# Altium PCB triple_integrated_driver_stepper_motor_controller_arduino_shield.pcbdoc (part 2 of 2)
Units mil, origin at the board's own origin, x right, y up, seen from the top; angles counter-clockwise.
Board outline 5050 x 3825 mil, 2 copper layers (Top Layer, Bottom Layer); 76 components, 119 nets, 386 pads, 303 vias.
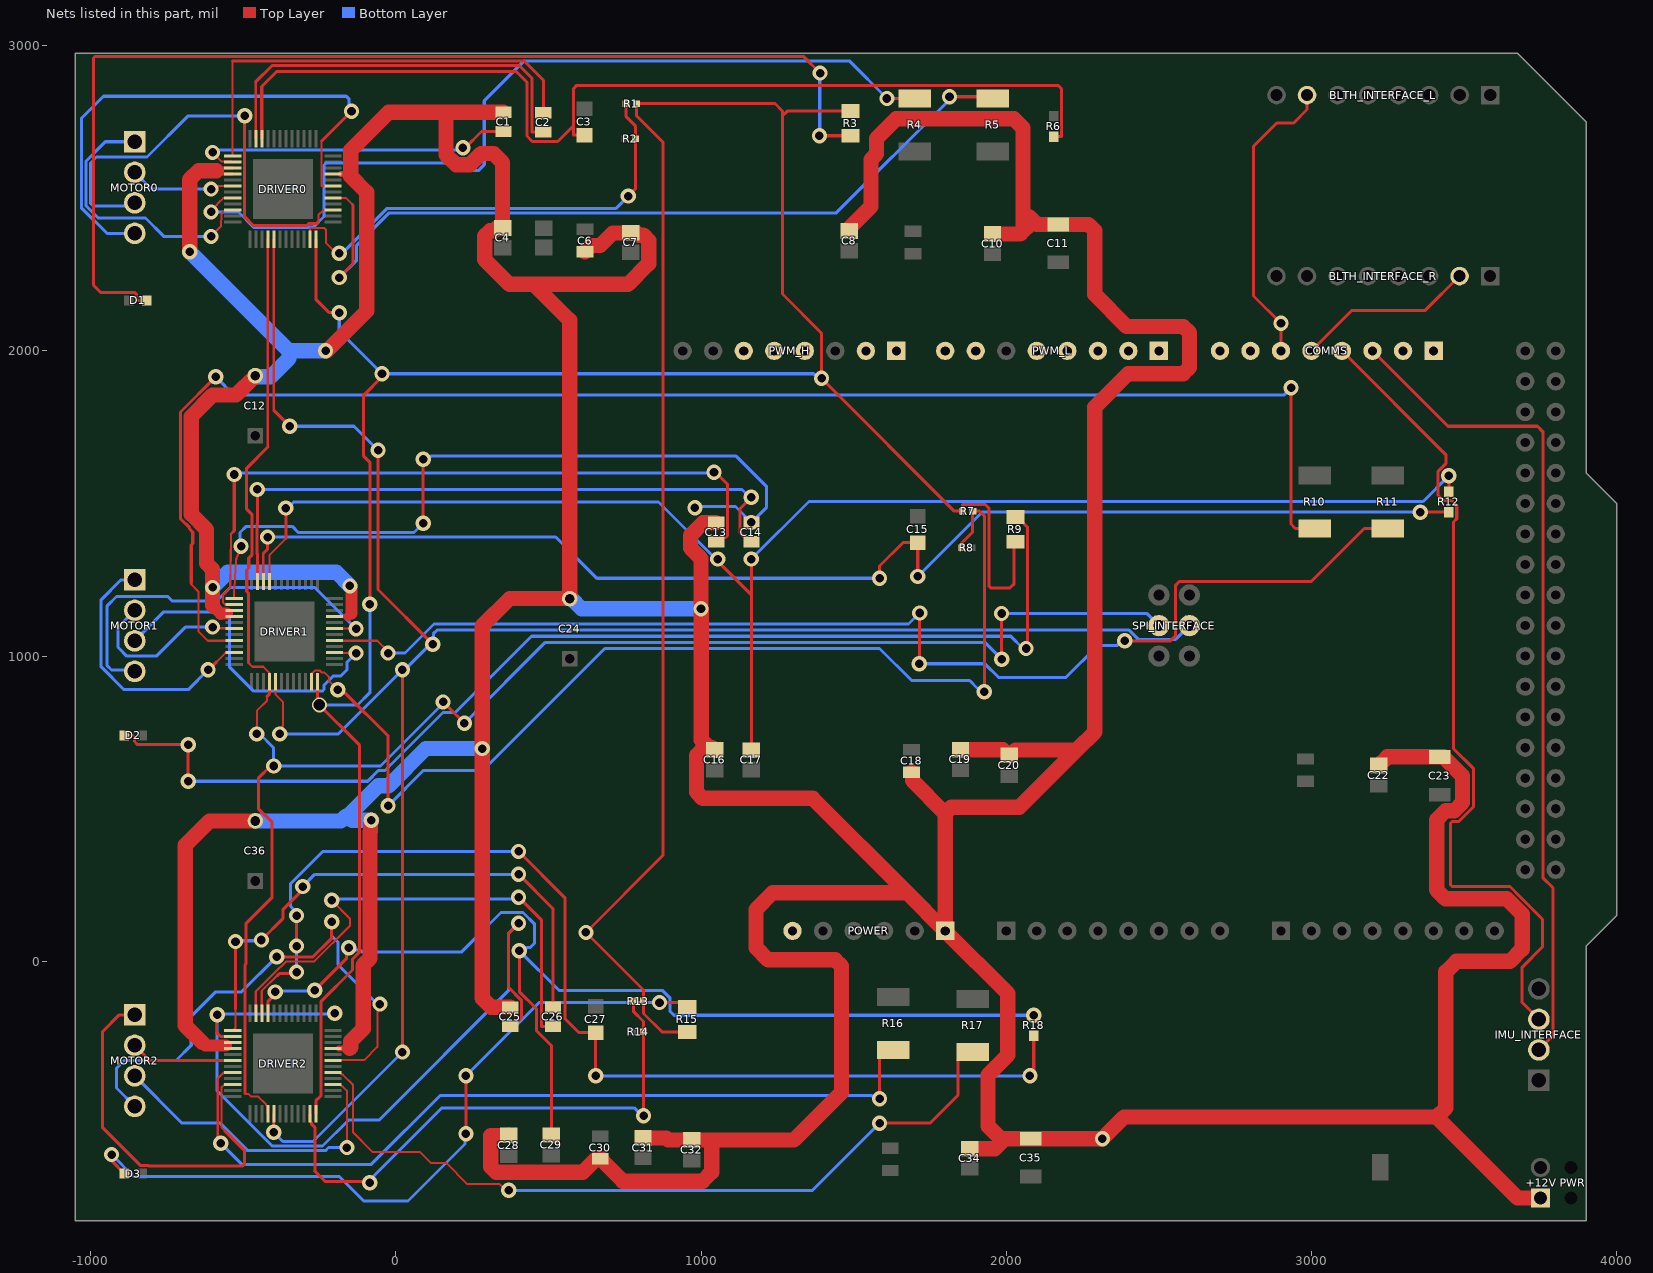
[diagram p2: the nets of this part, all layers, seen from the top]

## Via types
v1: diameter 50, hole 28, Top Layer to Bottom Layer, 157 vias
v2: diameter 22, hole 12, Top Layer to Bottom Layer, tented both sides, 141 vias
v3: diameter 23, hole 13, Top Layer to Bottom Layer, 1 vias
v4: diameter 22, hole 12.5, Top Layer to Bottom Layer, 1 vias
v5: diameter 40, hole 20, Top Layer to Bottom Layer, 1 vias
v6: diameter 50, hole 18, Top Layer to Bottom Layer, 1 vias
v7: diameter 50, hole 38, Top Layer to Bottom Layer, 1 vias

## Nets (pads, with @x,y where several pads share a name; then routed paths per layer and width w, separated by ;. In a path a pad name is that pad's centre, name@x,y a point inside that pad or via, vN(x,y) a via of type N, cw(c..) or ccw(c..) an arc to the next point about the centre after c; other vN are vias at no path point) (continued)
MOSI: DRIVER0.5 DRIVER1.5 DRIVER2.5 SPI_INTERFACE.4 | length 6889.5
  Top Layer w6.89: v1(-400,-560) -399.76,-559.76 -399.76,-499.61 DRIVER2.5@-399.53,-499.37 ; -399.53,1805.53 DRIVER0.5@-399.53,2365.63 ; DRIVER1.5@-394.53,915.63 -394.53,874.53 -370,850 -370,770.59 -371.75,768.84 -371.75,757.51 -380,749.26 v1(-380,745)
  Top Layer w10: -399.53,1805.53 v1(-347,1753) ; v1(-58,1674) -58,1218 v1(121,1039) ; v1(22,-297) v1(22,955)
  Bottom Layer w10: v1(-400,-560) -370,-590 -317.59,-590 -317.53,-590.06 -288.54,-590.06 -288.48,-590 -271,-590 v1(22,-297) ; v1(-380,745) -188,745 v1(22,955) 29.5,955 113.5,1039 v1(121,1039) 123.14,1041.14 123.14,1073.14 135,1085 2402.5,1085 2432.5,1055 2555,1055 SPI_INTERFACE.4@2600,1100 ; v1(-347,1753) -137,1753 v1(-58,1674)
NetC1_1: C1.1 DRIVER0.38 | length 1060.3
  Top Layer w6.89: v1(-600,2650) -570.06,2620.06 -535.85,2620.06 DRIVER0.38@-534.37,2618.58
  Top Layer w10: v1(220,2665) 227.5,2665 281,2718.5 C1.1@353.27,2718.5
  Bottom Layer w10: v1(-600,2650) -592.5,2657.5 212.5,2657.5 v1(220,2665)
NetC2_1: C2.1 DRIVER0.35 | length 1344.5
  Top Layer w6.89: DRIVER0.35@-458.58,2694.37 -458.58,2881.42
  Top Layer w10: -458.58,2881.42 -405,2935 405,2935 446,2894 446,2718.01 447,2717.01 C2.1@483.27,2717.01
NetC2_2: C2.2 DRIVER0.37 | length 1464.2
  Top Layer w6.89: -535,2950 -535,2638.27 DRIVER0.37@-534.37,2638.27
  Top Layer w10: -535,2950 420,2950 484,2886 484,2780.73 C2.2@483.27,2780
NetC13_1: C13.1 DRIVER1.38 | length 2321.6
  Top Layer w6.89: -540,1400 -540,1394.29 -542.02,1224.62 -566.36,1200.28 -566.36,1176.94 -558,1168.58 DRIVER1.38@-529.37,1168.58
  Top Layer w10: -540,1400 -529,1411 v1(-529,1595) ; v1(1042.5,1602.5) 1047.5,1602.5 1086.57,1563.43 1086.57,1394.56 1080.72,1388.7 1063.7,1388.7 C13.1@1050,1375
  Bottom Layer w10: v1(-529,1595) -524,1600 1040,1600 v1(1042.5,1602.5)
NetC14_1: C14.1 DRIVER1.35 | length 2112.1
  Top Layer w10: DRIVER1.35@-453.58,1244.37 -453.58,1335.5 -455,1336.91 -455,1431.51 -453.58,1432.93 v1(-453.58,1546) ; C14.1@1165,1375 1157.13,1375 1128.43,1403.7 1128.43,1483.43 v1(1165,1520)
  Bottom Layer w10: v1(-453.58,1546) 1134.43,1546 1160.43,1520 v1(1165,1520)
NetC14_2: C14.2 DRIVER1.37 | length 2578.6
  Top Layer w6.89: DRIVER1.37@-529.37,1188.27 -529.37,1189.11 -530,1189.74 -530,1219.82 -527.77,1222.05 -523.73,1316.24 -522.56,1317.41 -506.56,1355 v1(-506.56,1360)
  Top Layer w10: v1(90,1435) v1(90,1645)
  Bottom Layer w10: v1(-506.56,1360) -510,1363.44 -510,1405 -490,1425 -339.5,1425 -319.5,1405 60,1405 v1(90,1435) ; v1(90,1645) 97.65,1652.65 113.51,1652.65 115.86,1655 1115,1655 1215,1555 1215,1487.99 v1(1165,1437.99) 1112.99,1490 983.95,1490 v1(980,1486.05)
NetC15_1: C15.1 DRIVER1.34 R12.1 | length 4347
  Top Layer w6.89: DRIVER1.34@-433.9,1244.37 -433.9,1336.1
  Top Layer w10: -433.9,1336.1 -420,1350 v1(-420,1390) ; v1(1585,1255) 1585,1295 1661.69,1371.69 C15.1@1710,1371.69 v1(1710,1261) ; v1(3356.54,1471.54) R12.1@3450,1471.54
  Bottom Layer w10: v1(-420,1390) 523.83,1390 658.83,1255 v1(1585,1255) ; v1(1710,1261) 1920.54,1471.54 v1(3356.54,1471.54)
NetC17_2: C17.2 DRIVER1.33 R12.2 | length 5003.5
  Top Layer w6.89: DRIVER1.33@-414.21,1244.37 -414.21,1330.79 -360,1385
  Top Layer w10: -360,1385 v1(-360,1485) ; v1(1055,1318) 1055,1311 1165,1201 ; C17.2@1165,691.5 1165,1201 ; v1(1165,1318) 1165,1201 ; R12.2@3450,1538.46 v1(3450,1591)
  Bottom Layer w10: v1(-360,1485) -354.14,1485 -334.14,1505 861,1505 1048,1318 v1(1055,1318) ; v1(1165,1318) 1353.54,1506.54 3365.54,1506.54 v1(3450,1591)
NetC25_1: C25.1 DRIVER2.38 | length 2614.9
  Top Layer w6.89: -585,-235 v1(-585,-175)
  Top Layer w10: -585,-235 -573.58,-246.42 DRIVER2.38@-534.37,-246.42 ; C25.1@375,-212.99 382.87,-212.99 411.57,-184.29 411.57,-127.16 370,-85.58 370,92.5 v1(402.5,125)
  Bottom Layer w10: v1(-200,-170) -202.5,-172.5 -582.5,-172.5 v1(-585,-175) -585,-424.5 -404.5,-605 -323.8,-605 -323.75,-605.06 -282.32,-605.06 -282.27,-605 -240,-605 -155,-520 -55,-520 370,-95 370,92.5 v1(402.5,125)
NetC26_1: C26.1 DRIVER2.35 | length 1685
  Top Layer w6.89: DRIVER2.35@-458.58,-170.63 -458.58,-101.44 -458.58,-98.58 -391.57,-31.57 -386.8,-26.8 -367.86,-10.07 ccw(c-390,15) -367.52,-9.77 ccw(c-390,15) -366.35,-8.65 -357.7,0 -267.05,0 -150,117.05 -150,140 v1(-210,200)
  Top Layer w10: v1(402.5,210) 478,134.5 478,-212.99 C26.1@515,-212.99
  Bottom Layer w10: v1(-210,200) -205,205 397.5,205 v1(402.5,210)
NetC26_2: C26.2 DRIVER2.37 | length 1819
  Top Layer w6.89: DRIVER2.37@-534.37,-226.73 -524.47,-216.83 -524.47,-156.48
  Top Layer w10: -525,-155.94 v1(-525,65) ; v1(-440,70) -370,140 -370,169.18 -305,234.18 v1(-305,245) ; v1(402.5,285) 515,172.5 C26.2@515,-150
  Bottom Layer w10: v1(-525,65) -522.5,67.5 -442.5,67.5 v1(-440,70) ; v1(-305,245) -265,285 v1(402.5,285)
NetC27_1: C27.1 DRIVER2.34 R18.1 | length 3734.4
  Top Layer w6.89: DRIVER2.34@-438.9,-170.63 -438.9,-96.6 -388.4,-46.1 -387.09,-46.1
  Top Layer w10: -387.74,-46.76 -381.23,-40.24 -330.24,-40.24 v1(-325,-35) ; v1(-325,50) v1(-325,150) ; v1(402.5,360) 554,208.5 554,-187.31 600,-233.31 C27.1@655,-233.31 v1(655,-375) ; v1(2077.5,-375) 2090,-362.5 R18.1@2090,-243.46
  Bottom Layer w10: v1(-325,-35) v1(-325,50) ; v1(-325,150) -325,160.82 -345,180.82 -345,254.5 -239.5,360 v1(402.5,360) ; v1(655,-375) v1(2077.5,-375)
NetC29_2: C29.2 DRIVER2.33 R18.2 | length 3651.7
  Top Layer w10: DRIVER2.33@-419.21,-170.63 -419.13,-170.55 -419.13,-132.44 -395,-108.3 v1(-395,-100) ; v1(-265,-95) -161.91,8.09 -161.91,36.63 v1(-154.26,44.28) ; v1(405,35) 405,-99.37 461.33,-155.7 461.33,-227.33 510,-276 C29.2@510,-570
  Bottom Layer w10: v1(-395,-100) -392.5,-97.5 -267.5,-97.5 v1(-265,-95) ; v1(-154.26,44.28) -146.61,36.63 -115.89,36.63 -109.26,30 215,30 345,160 417,160 455,122 455,60 440,45 430.86,45 428.51,42.65 412.65,42.65 v1(405,35) 535,-95 873.5,-95 899,-120.5 899,-164.14 911.39,-176.54 v1(2090,-176.54)
NetD1_2: D1.2 R3.2 | length 3661.1
  Top Layer w10: D1.2@-815.47,2165 -842.92,2165 -848.78,2170.86 -848.78,2184.89 -854.64,2190.75 -965.75,2190.75 -990,2215 -990,2959.14 -984.14,2965 1335,2965 v1(1390,2910) ; v1(1388,2704.58) R3.2@1490,2704.58
  Bottom Layer w10: v1(1388,2704.58) 1389,2705.58 1389,2909 v1(1390,2910)
NetD2_2: D2.2 R9.2 | length 3760.9
  Top Layer w10: D2.2@-889.06,740 -861.61,740 -855.75,734.14 -855.75,720.11 -845.64,710 v1(-680,710) v1(-680,590) ; R9.2@2030,1455.42 2036.88,1455.42 2069.69,1422.61 2069.69,1029.69 v1(2065,1025)
  Bottom Layer w10: v1(-680,590) -92.19,590 -57.19,625 -35,625 155,815 195,815 445,1065 2014.72,1065 2054.72,1025 v1(2065,1025)
NetD3_2: D3.2 R15.2 | length 2432.4
  Top Layer w10: v1(-930.83,-633) -930.83,-653.22 D3.2@-889.06,-695 ; v1(230,-565) v1(230,-375) ; v1(864,-135) 940,-135 R15.2@955,-150
  Bottom Layer w10: v1(-930.83,-633) -858.83,-705 -185,-705 -105,-785 40,-785 226.72,-598.28 226.72,-568.28 v1(230,-565) ; v1(230,-375) 470,-135 v1(864,-135)
NetDRIVER0_15: DRIVER0.15 MOTOR0.3 | length 1520.1
  Top Layer w6.89: -254,2423 -253,2424 -253,2445.6 -237.5,2461.1 DRIVER0.15@-205.63,2461.1
  Top Layer w10: v1(-495,2770) -495,2439 -466,2410 -292.43,2410 -285.93,2416.5 -260.5,2416.5 -254,2423
  Bottom Layer w10: MOTOR0.3@-855,2485 -865.2,2474.8 -991.9,2474.8 -1000,2482.9 -1000,2615 -980,2635 -815,2635 -680,2770 v1(-495,2770)
NetDRIVER0_17: DRIVER0.17 R5.1 | length 2753.5
  Top Layer w6.89: DRIVER0.17@-205.63,2500.47 -162.5,2500.47 -141,2478.97
  Top Layer w10: v1(-185,2240) -140,2285 -140,2477.97 -141,2478.97 ; v1(1814,2832.5) 1949.15,2832.5 R5.1@1955,2826.65
  Bottom Layer w10: v1(-185,2240) -128.25,2296.75 -128.25,2345.54 -21.78,2452.01 1443.01,2452.01 1814,2823 v1(1814,2832.5)
NetDRIVER0_19: DRIVER0.19 MOTOR0.4 | length 1778.7
  Top Layer w6.89: -243,2687 -243,2540.84 -242,2539.84 DRIVER0.19@-205.63,2539.84
  Top Layer w10: -243,2687 v1(-145,2785)
  Bottom Layer w10: MOTOR0.4@-855,2385 -946.21,2385 -1030,2468.79 -1030,2761.21 -957.07,2834.14 -162.54,2834.14 -152.65,2824.26 -152.65,2792.65 v1(-145,2785)
NetDRIVER0_42: DRIVER0.42 MOTOR0.2 | length 347.5
  Top Layer w6.89: v1(-605,2530) -593.33,2530 -583.49,2539.84 DRIVER0.42@-534.37,2539.84
  Bottom Layer w10: MOTOR0.2@-855,2585 -800,2530 v1(-605,2530)
NetDRIVER0_44: DRIVER0.44 R4.1 | length 2936.1
  Top Layer w6.89: v1(-605,2455) -580.56,2485.44 -565.53,2500.47 DRIVER0.44@-534.37,2500.47
  Top Layer w10: v1(1609,2826.65) R4.1@1700,2826.65
  Bottom Layer w10: v1(-605,2455) -515,2455 -465,2405 -270,2405 -235,2440 -235,2609.14 -229.14,2615 190.58,2615 215.38,2590.2 270.2,2590.2 290,2610 290,2819.14 420.86,2950 1485.65,2950 v1(1609,2826.65)
NetDRIVER0_46: DRIVER0.46 MOTOR0.1 | length 913.2
  Top Layer w6.89: v1(-605,2375) -605,2375.86 -571.92,2408.94 -571.36,2449.84 -566.41,2454.78 -559.47,2459.63 DRIVER0.46@-534.37,2461.1
  Bottom Layer w10: MOTOR0.1@-855,2685 -951.21,2685 -1015,2621.21 -1015,2475 -975,2435 -820,2435 -760,2375 v1(-605,2375)
NetDRIVER1_11: DRIVER1.11 R7.2 R8.1 | length 3587.6
  Top Layer w6.89: DRIVER1.11@-276.42,915.63 -274.94,917.11 -274.94,942.83 -265.15,952.62 -248.31,952.62 -241.66,945.96 -232.96,945.96 -219.12,932.12 -219.12,919.12 v1(-190,890)
  Top Layer w10: v1(-190,890) -179.18,890 -167.39,878.22 -165.22,878.22 -25,738 v1(-25,510) ; R8.1@1853.27,1355 1853.27,1369.83 1890,1406.57 R7.2@1890,1475 1912.5,1475 1928,1459.5 v1(1928,883)
  Bottom Layer w10: v1(-25,510) 90,625 285,625 685,1025 1585,1025 1690,920 1880,920 1904.22,895.78 1904.39,895.78 1917.18,883 v1(1928,883)
NetDRIVER1_15: DRIVER1.15 MOTOR1.3 | length 1114.5
  Top Layer w6.89: DRIVER1.15@-200.63,1011.1 -200.08,1010.55 -130.55,1010.55 v1(-130,1010)
  Bottom Layer w10: MOTOR1.3@-855,1050 -760,1145 -560,1145 -545,1130 -545,965 -465,885 -240.86,885 -235,890.86 -235,905 -205,935 -180,935 -160,955 -160,980 v1(-130,1010)
NetDRIVER1_17: DRIVER1.17 R11.1 | length 4010.1
  Top Layer w6.89: DRIVER1.17@-200.63,1050.47 -60.47,1050.47 -25,1015 v1(-25,1010)
  Top Layer w10: v1(1715,975) 1715.59,975.59 1715.59,1140.59 v1(1716.17,1141.17) ; v1(2388,1050) 2537.5,1050 2555,1067.5 2555,1232.5 2567.5,1245 2999.65,1245 3173,1418.35 R11.1@3250,1418.35
  Bottom Layer w10: v1(-25,1010) 30,1010 125,1105 1680,1105 v1(1716.17,1141.17) ; v1(1715,975) 1930,975 1975,930 2195,930 2299.23,1034.23 2362.14,1034.23 2377.91,1050 v1(2388,1050)
NetDRIVER1_19: DRIVER1.19 MOTOR1.4 | length 1273.6
  Top Layer w6.89: DRIVER1.19@-200.63,1089.84 v1@-130,1089.84
  Bottom Layer w10: MOTOR1.4@-855,950 -859.61,954.61 -931.18,954.61 -945.2,968.63 -945.2,1164.8 -914.57,1195.43 -746.65,1195.43 -731.21,1180 -587.5,1180 -542.5,1225 -265,1225 v1(-130,1090)
NetDRIVER1_42: DRIVER1.42 MOTOR1.2 | length 577.8
  Top Layer w6.89: v1(-600,1095) -596.32,1091.32 -530.85,1091.32 DRIVER1.42@-529.37,1089.84
  Bottom Layer w10: MOTOR1.2@-855,1150 -910,1095 -910,1029.14 -880.86,1000 -784.41,1000 -689.41,1095 v1(-600,1095)
NetDRIVER1_44: DRIVER1.44 R10.1 | length 5126.6
  Top Layer w6.89: -670,1240 -670,1235 -646.56,1211.56 -646.56,1081.56 -615.47,1050.47 DRIVER1.44@-529.37,1050.47
  Top Layer w10: -670,1240 -670,1363.79 -665,1368.79 -665,1406.21 -675,1416.21 -675,1420 -705,1450 -705,1800 v1(-590,1915) ; v1(2933,1879) 2933,1432.5 2947.15,1418.35 R10.1@3010,1418.35
  Bottom Layer w10: v1(-590,1915) -530,1855 2908.72,1855 2932.72,1879 v1(2933,1879)
NetDRIVER1_46: DRIVER1.46 MOTOR1.1 | length 873.8
  Top Layer w6.89: -588.1,980 -557,1011.1 DRIVER1.46@-529.37,1011.1
  Top Layer w10: v1(-614.81,955) -613.1,955 -588.1,980
  Bottom Layer w10: MOTOR1.1@-855,1250 -900,1250 -965,1185 -965,965 -890,890 -679.81,890 v1(-614.81,955)
NetDRIVER2_11: DRIVER2.11 R13.2 R14.1 | length 1795.3
  Top Layer w10: DRIVER2.11@-281.42,-499.37 -281.42,-522.83 -276.65,-527.6 -276.65,-532.06 -265,-543.71 -265,-685 -266.22,-686.22 -231.95,-720.5 -89.5,-720.5 v1(-85,-725) ; R13.2@778.27,-130 778.27,-163.54 811.73,-197 R14.1@811.73,-230 v1(811.73,-506)
  Bottom Layer w10: v1(-85,-725) -85,-716.5 151.5,-480 781.16,-480 807.16,-506 v1(811.73,-506)
NetDRIVER2_15: DRIVER2.15 MOTOR2.3 | length 1040.7
  Top Layer w6.89: DRIVER2.15@-205.63,-403.9 -182.01,-403.9 -175.69,-410.22 -173.59,-410.22 -160,-423.8 v1(-160,-610)
  Bottom Layer w10: MOTOR2.3@-855,-375 -700,-530 -575,-530 -485,-620 -330.01,-620 -329.96,-620.06 -276.11,-620.06 -276.05,-620 -230,-620 -220,-610 v1(-160,-610)
NetDRIVER2_17: DRIVER2.17 R17.1 | length 2603.2
  Top Layer w6.89: DRIVER2.17@-205.63,-364.53 -182.01,-364.53 -180.53,-366 -180.53,-366.81 -176.5,-370.85 -173.59,-370.85 -140,-404.43 -140,-560 -75,-625 80,-625 115,-660 165,-660 234.67,-729.67 340.36,-729.67 360.7,-750 v1(370,-750)
  Top Layer w10: v1(1585,-530) 1750,-530 1841.73,-438.27 1841.73,-321.26 1866.34,-296.65 R17.1@1890,-296.65
  Bottom Layer w10: v1(370,-750) 1365,-750 v1(1585,-530)
NetDRIVER2_19: DRIVER2.19 MOTOR2.4 | length 1789
  Top Layer w6.89: DRIVER2.19@-205.63,-325.16 -204.15,-323.68 -103.68,-323.68 -60,-280 -60,-148.24 v1(-51.76,-140)
  Top Layer w10: v1(-390,15) -271.07,15 -210,76.07 v1(-210,130)
  Bottom Layer w10: MOTOR2.4@-855,-475 -915,-415 -915,-350 -890,-325 -720,-325 -670,-275 -670,-180 -590,-100 -505,-100 v1(-390,15) ; v1(-210,130) -210,83.28 -189.26,62.55 -189.26,-10.74 -60,-140 v1(-51.76,-140)
NetDRIVER2_42: DRIVER2.42 MOTOR2.2 | length 341.4
  Top Layer w10: MOTOR2.2@-855,-275 -804.84,-325.16 DRIVER2.42@-534.37,-325.16
NetDRIVER2_44: DRIVER2.44 R16.1 | length 2749.8
  Top Layer w6.89: v1@-583.25,-585.75 -583.25,-383.62 -564.16,-364.53 DRIVER2.44@-534.37,-364.53
  Top Layer w10: v1@-583.25,-585.75 v1(-573,-596) ; v1(1585,-450) 1585,-311.34 1606.34,-290 R16.1@1630,-290
  Bottom Layer w10: v1(-573,-596) -504,-665 -80,-665 145,-440 1559.14,-440 1561.49,-442.35 1577.35,-442.35 v1(1585,-450)
NetDRIVER2_46: DRIVER2.46 MOTOR2.1 | length 1285.6
  Top Layer w6.89: -560,-555 -571.36,-543.64 -571.36,-413.26 -562,-403.9 DRIVER2.46@-534.37,-403.9
  Top Layer w10: MOTOR2.1@-855,-175 -905.43,-175 -960,-229.57 -960,-545 -835.75,-669.25 -810.11,-669.25 -809.36,-670 -500.86,-670 -495,-664.14 -495,-620 -560,-555
PWM2: PWM_L.3
PWM3: PWM_L.4
PWM4: PWM_L.5
PWM6: PWM_L.7
PWM7: PWM_L.8
PWM8: PWM_H.1
PWM9: PWM_H.2
PWM11: PWM_H.4
PWM12: PWM_H.5
PWM13: PWM_H.6
RESET: POWER.6
RX0: PWM_L.1
RX1: COMMS.3 IMU_INTERFACE.2 | length 2725.5
  Top Layer w10: COMMS.3@3200,2000 3447,1753 3740,1753 3758,1735 3758,274 3791,241 3791,-244 IMU_INTERFACE.2@3745,-290
RX2: BLTH_INTERFACE_R.2 COMMS.5 | length 586.5
  Top Layer w10: COMMS.5@3000,2000 3132.62,2132.62 3372.62,2132.62 BLTH_INTERFACE_R.2@3485,2245
RX3: COMMS.7
SCK: DRIVER0.4 DRIVER1.4 DRIVER2.4 SPI_INTERFACE.3 | length 6455.5
  Top Layer w6.89: -494,-432 -490.94,-435.06 -481.74,-435.06 -473.77,-443.03 -449.83,-443.03 -425.53,-467.33 -425.53,-469.43 -420.69,-474.27 -420.69,-497.89 DRIVER2.4@-419.21,-499.37 ; -482.5,977.84 -469.66,965 -434.21,965 -414.21,945 DRIVER1.4@-414.21,915.63 ; v1(-455,745) -455,820.59 -421.16,854.43 -421.16,868.52 ; -419.21,1685 DRIVER0.4@-419.21,2365.63
  Top Layer w10: -494,-432 -494,-11.25 -490,-7.25 -490,125 -405,210 -405,455.33 -450,500.33 -450,600 -410,640 v1(-400,640) ; -482.5,977.84 -482.5,1206 -488.19,1211.68 -488.19,1282.27 -481.56,1288.91 -481.56,1320.5 -471.56,1330.5 -471.56,1464.55 -488.58,1481.58 -488.58,1615.63 -419.21,1685 ; -421.16,868.52 -414.21,875.46 DRIVER1.4@-414.21,915.63 ; v1(155,850) v1(225,780) ; v1(1984.57,1139.57) 1984.79,1139.36 1984.79,990.21 v1(1985,990)
  Bottom Layer w10: v1(-455,745) -445,745 -400.82,700.82 -400.82,640.82 v1(-400,640) -50,640 155,845 v1(155,850) ; v1(225,780) 490,1045 1930,1045 v1(1985,990) ; v1(1984.57,1139.57) 1985,1140 2460,1140 SPI_INTERFACE.3@2500,1100
SCL: COMMS.1
SD_MODE_0: DRIVER0.11 R1.2 R2.1 | length 1542.3
  Top Layer w6.89: DRIVER0.11@-281.42,2365.63 -281.42,2402 -280.42,2403 -235,2403 -227.99,2395.99 -227.99,2352.99 -195,2320 v1(-185,2320)
  Top Layer w10: R1.2@754.8,2810 754.8,2767.2 785,2737 R2.1@785,2695 785,2530 v1(762,2507)
  Bottom Layer w10: v1(-185,2320) -175,2320 -27.99,2467.01 722.01,2467.01 v1(762,2507)
SDA: COMMS.2
TX0: PWM_L.2
TX1: COMMS.4 IMU_INTERFACE.3 | length 2743.8
  Top Layer w10: COMMS.4@3100,2000 3440,1660 3440,1630.5 3415,1605.5 3415,1525.86 3431.23,1509.63 3459.52,1509.63 3475.75,1493.39 3475.75,1449.68 3465.43,1439.36 3465.43,696.78 3530,632.21 3530,505.99 3482.36,458.35 3460.86,458.35 3455,452.49 3455,250.86 3460.86,245 3650,245 3682.24,212.76 3682.24,212.26 3756.79,137.71 3756.79,47.75 3690,-19.04 3690,-135 IMU_INTERFACE.3@3745,-190
TX2: BLTH_INTERFACE_L.7 COMMS.6 | length 983.6
  Top Layer w10: COMMS.6@2900,2000 v1(2900,2090) 2810,2180 2810,2670 2886.55,2746.55 2941.55,2746.55 2985.39,2790.39 BLTH_INTERFACE_L.7@2985.39,2837.91
  Bottom Layer w10: v1(2900,2090) v1@2902.5,2092.5
TX3: COMMS.8
VCC: C3.1 DRIVER0.34 R6.1 | length 3411.2
  Top Layer w10: DRIVER0.34@-438.9,2694.37 -438.9,2866.1 -390,2915 395,2915 429.84,2880.16 429.84,2703.66 447.5,2686 530.31,2686 582,2737.69 ; C3.1@618.27,2706.69 583,2706.69 582,2707.69 582,2737.69 ; R6.1@2155,2701.54 2180,2701.54 2181,2702.54 2181,2858.5 2169.5,2870 593,2870 582,2859 582,2737.69
VCC_IO: DRIVER0.12 DRIVER1.12 DRIVER2.12 R1.1 R3.1 R7.1 R9.1 R13.1 R15.1 | length 11041.9
  Top Layer w10: DRIVER2.12@-261.73,-499.37 -261.73,-456.73 -244.17,-439.17 -244.17,-130.96 -141.76,-28.55 -141.76,7.28 -119.26,29.78 -119.26,709.26 -256.65,846.65 DRIVER1.12@-256.73,915.63 DRIVER1.12@-256.73,915.63 ; DRIVER0.12@-261.73,2365.63 -261.73,2168.73 -219.14,2126.14 -186.14,2126.14 v1(-185,2125) ; v1(-85,1170) -85,1635 -105,1655 -105,1855 -45,1915 v1(-45,1925) ; R15.1@955,-230.84 872,-230.84 811.73,-170.57 R13.1@811.73,-130 811.73,-94 v1(623,94.73) 875,346.73 875,2684 788.27,2770.73 R1.1@788.27,2810 1242.42,2810 1267,2785.42 1267,2770 ; R3.1@1490,2785.42 1282.42,2785.42 1267,2770 ; R9.1@2030,1374.58 2026,1374.58 2026,1237 2012.5,1223.5 1949,1223.5 1943,1229.5 1943,1485 1932,1496 1857.54,1496 1856.54,1495 R7.1@1856.54,1475 1830,1475 v1(1395,1910) 1395,2058 1267,2186 1267,2770
  Bottom Layer w10: v7(-250,840) -125,840 -85,880 v1(-85,1170) ; v1(-185,2125) -185,2065 v1(-45,1925) 1369.18,1925 1384.18,1910 v1(1395,1910)
VIN: "+12V PWR.1" C1.2 C4.2 C6.1 C7.2 C8.2 C10.2 C11.2 C12.2 C13.2 C16.2 C18.1 C19.2 C20.2 C22.2 C23.2 C24.2 C25.2 C28.2 C30.1 C31.2 C32.2 C34.2 C35.2 C36.2 DRIVER0.21 DRIVER0.39 DRIVER0.40 DRIVER1.21 DRIVER1.39 DRIVER1.40 DRIVER2.21 DRIVER2.39 DRIVER2.40 POWER.1 | length 27033.7
  Top Layer w10: -633.9,-266.1 -624.05,-275.95 ; DRIVER2.40@-534.37,-285.79 -556.1,-285.79 -556.18,-285.71 -556.18,-275.95 -556.18,-266.18 -556.1,-266.1 DRIVER2.39@-534.37,-266.1 ; DRIVER0.40@-534.37,2579.21 -576.51,2579.21 -587.3,2590 -578.4,2598.9 DRIVER0.39@-534.37,2598.9 ; DRIVER1.40@-529.37,1129.21 -552.83,1129.21 -552.91,1129.29 -552.91,1139.05 -552.91,1148.82 -552.83,1148.9 DRIVER1.39@-529.37,1148.9 ; DRIVER1.21@-200.63,1129.21 -155.79,1129.21 ; -106.76,-221.26 -93.44,-207.94
  Top Layer w19: DRIVER2.21@-186.59,-285.79 -171.29,-285.79 -170.28,-284.78 -150.43,-284.78 ; DRIVER0.21@-180,2579.21 -149.43,2579.21
  Top Layer w30: -155.79,1129.21 -145,1140
  Top Layer w39: -624.05,-275.95 -556.18,-275.95 ; -573.31,1139.05 -552.91,1139.05
  Top Layer w40: -600,1165.75 -573.31,1139.05 ; v1(-150,1230) -145,1225 -145,1140
  Top Layer w50: v1(-675,2325) -675,2560.71 -645.71,2590 -587.3,2590 ; -633.9,-266.1 -690,-210 -690,380 -610,460 C36.2@-460,460 ; -600,1165.75 v1(-600,1225) -600,1284.29 -620,1304.29 -620,1415 -670,1465 -670,1785 -600,1855 -523.43,1855 C12.2@-460,1918.43 ; v1(-230,2000) -226,2000 -95,2131 -95,2519.21 -147.09,2571.3 -147.09,2576.88 -149.42,2579.21 -147.09,2581.55 -147.09,2657.91 -23.5,2781.5 171.5,2781.5 ; -150.43,-284.78 -147.09,-281.44 -147.09,-261.59 -106.76,-221.26 -106.76,-12.57 -84.26,9.93 -84.26,424.74 -82.33,426.67 -82.33,459.67 v1(-80,462) ; 171.99,2781.99 171.5,2781.5 ; C1.2@353.27,2781.5 171.5,2781.5 ; C28.2@370,-570 369.41,-570.59 311.46,-570.59 311.46,-672.98 329.03,-690.55 612.87,-690.55 655.8,-647.62 C30.1@667.44,-647.62 ; C25.2@375,-150 312.29,-150 283,-120.71 v1(283,697) 283,1098 373.42,1188.42 C24.2@570,1188.42 570,2100 452.06,2217.94 ; C6.1@620,2325 640,2345 670,2345 710.91,2385.91 769.41,2385.91 C7.2@770,2386.5 770.59,2385.91 789.37,2385.91 796.18,2379.09 810.97,2379.09 828.54,2361.52 828.54,2285.49 760.99,2217.94 452.06,2217.94 ; C30.1@676,-646.42 C30.1@670,-646.42 743.58,-720 1005.71,-720 1035,-690.71 1035,-585.04 ; C31.2@810,-578.5 886,-578.5 892.54,-585.04 C32.2@970,-585.04 1035,-585.04 ; v1(1000,1155) 1000,1320 965.71,1354.29 965.71,1395.71 1006.79,1436.79 C13.2@1048.43,1436.79 ; v1@1000.93,1155 1000.93,725.15 1025.5,700.57 1036.91,700.57 C16.2@1045,692.48 ; 1010.31,700.31 985,675 985,554.5 1005.5,534 1366,534 1675,225 ; C8.2@1485,2392.48 1487.95,2392.48 1488.54,2393.07 1488.54,2404.62 1557.19,2473.26 1557.19,2627.19 1575,2645 1575,2696 1639,2760 2025.71,2760 2055,2730.71 2055,2391.99 ; C18.1@1690,620 1692.56,617.44 1692.56,592.44 1800,485 ; C19.2@1850,692.99 1989.02,692.99 2006.46,675.55 2009.41,675.55 C20.2@2010,674.96 2012.95,674.96 2030.39,692.4 2230.44,692.4 ; C34.2@1880,-613.5 1963,-613.5 1995.52,-580.98 ; C10.2@1955,2382.99 2046,2382.99 2055,2391.99 ; C22.2@3220,641.5 3248.5,670 C23.2@3420,670 3432.8,670 3495,607.8 3495,520.49 3467.86,493.35 3439.58,493.35 3410,463.77 3410,234.29 3439.29,205 3640,205 3690,155 3690,40 3650,0 3474.25,0 3440,-34.25 3440,-480 3410,-510 ; 3750,-775 3675,-775 3410,-510 ; 171.5,2781.5 165,2775 165,2642.22 197.22,2610 242.78,2610 279.29,2646.51 320.71,2646.51 350,2617.22 C4.2@350,2402.48 349.41,2401.89 330.63,2401.89 321.85,2393.11 309.03,2393.11 291.46,2375.54 291.46,2299.5 373.02,2217.94 452.06,2217.94 ; 1035,-585.04 1305,-585.04 1460,-430.04 1460,-15.5 1439.5,5 1220,5 1180,45 1180,170 1235,225 1675,225 ; 1675,225 POWER.1@1800,100 ; POWER.1@1800,100 2005,-105 2005,-306.96 1940,-371.96 1940,-540.02 1980.97,-580.98 1995.52,-580.98 ; POWER.1@1800,100 1800,485 ; 1800,485 1820,505 2043.04,505 2230.44,692.4 ; 1995.52,-580.98 C35.2@2080,-580.98 v1(2314.97,-580.98) 2385.95,-510 3410,-510 ; 2055,2391.99 2074,2410.99 2074,2440.02 2100,2414.02 C11.2@2170,2414.02 2269.5,2414.02 2290,2393.51 2290,2184.25 2394.25,2080 2579.5,2080 2600,2059.5 2600,1945.5 2579.5,1925 2399.25,1925 2290,1815.75 2290,751.96 2230.44,692.4
  Bottom Layer w50: v1(-675,2325) -350,2000 ; v1(-600,1225) -550,1275 -195,1275 v1(-150,1230) ; C36.2@-460,460 -179.19,460 -162.78,476.41 -156.28,476.41 ; C12.2@-460,1918.43 -456.57,1915 -410,1915 -350,1975 -350,2000 ; v1(-230,2000) -350,2000 ; v1@-80.57,462.57 -142.43,462.57 -156.28,476.41 ; v1(283,697) 98.21,697 -23.79,575 -57.69,575 -156.28,476.41 ; C24.2@570,1188.42 575.86,1188.42 609.29,1155 v1(1000,1155)
pads on no net: "+12V PWR.MH1" "+12V PWR.MH2" BLTH_INTERFACE_L.1 BLTH_INTERFACE_L.2 BLTH_INTERFACE_L.3 BLTH_INTERFACE_L.4 BLTH_INTERFACE_L.5 BLTH_INTERFACE_L.6 BLTH_INTERFACE_L.8 BLTH_INTERFACE_R.1 BLTH_INTERFACE_R.3 BLTH_INTERFACE_R.4 BLTH_INTERFACE_R.5 BLTH_INTERFACE_R.6 DRIVER0.6 DRIVER0.8 DRIVER0.9 DRIVER0.14 DRIVER0.16 DRIVER0.18 DRIVER0.20 DRIVER0.22 DRIVER0.23 DRIVER0.24 DRIVER0.25 DRIVER0.26 DRIVER0.27 DRIVER0.30 DRIVER0.31 DRIVER0.36 DRIVER0.41 DRIVER0.43 DRIVER0.45 DRIVER0.47 DRIVER1.6 DRIVER1.8 DRIVER1.9 DRIVER1.14 DRIVER1.16 DRIVER1.18 DRIVER1.20 DRIVER1.22 DRIVER1.23 DRIVER1.24 DRIVER1.25 DRIVER1.26 DRIVER1.27 DRIVER1.30 DRIVER1.31 DRIVER1.36 DRIVER1.41 DRIVER1.43 DRIVER1.45 DRIVER1.47 DRIVER2.6 DRIVER2.8 DRIVER2.9 DRIVER2.14 DRIVER2.16 DRIVER2.18 DRIVER2.20 DRIVER2.22 DRIVER2.23 DRIVER2.24 DRIVER2.25 DRIVER2.26 DRIVER2.27 DRIVER2.30 DRIVER2.31 DRIVER2.36 DRIVER2.41 DRIVER2.43 DRIVER2.45 DRIVER2.47 SPI_INTERFACE.5

## Polygon pours and split planes (outlines as drawn)
GND on Bottom Layer "t" (solid, pour order 1): -1050,-850 -1050,2975 3675,2975 3900,2750 3900,1600 4000,1500 4000,150 3900,50 3900,-850

## Silkscreen, mask and mechanical layers (free items; w line width, h text height)
Top Overlay:
  lines w10: 1075,1775 1100,1750 1725,1750 1750,1725 1775,1750 2475,1750 2500,1775 ; 1400,250 1425,275 1600,275 1625,300 1650,275 1825,275 1850,250 ; 2000,250 2025,275 2800,275 2825,300 2850,275 3592.93,275 3612.7,255.23 ; 2350,1850 2375,1825 2875,1825 2900,1800 2925,1825 3400,1825 3425,1850
  text "TX" at 2970,2955 h30 r270
  text "5V" at 2865,2185 h30 r270
  text "GND" at 2965,2185 h30 r270
  text "RX" at 3470,2185 h30 r270
  text "5V" at 3575,2000 h20 r315
  text "5V" at 3875,1975 h20 r45
  text "PWM2" at 2300,1925 h20 r225
  text "TX0" at 2400,1925 h20 r225
  text "RX0" at 2500,1925 h20 r225
  text "TX3" at 2700,1925 h20 r225
  text "RX3" at 2800,1925 h20 r225
  text "TX2" at 2900,1925 h20 r225
  text "RX2" at 3000,1925 h20 r225
  text "TX1" at 3100,1925 h20 r225
  text "RX1" at 3200,1925 h20 r225
  text "SDA" at 3300,1925 h20 r225
  text "SCL" at 3400,1925 h20 r225
  text "AREF" at 940,1920 h20 r225
  text "GND" at 1040,1920 h20 r225
  text "PWM13" at 1140,1920 h20 r225
  text "PWM12" at 1240,1920 h20 r225
  text "PWM11" at 1340,1920 h20 r225
  text "PWM10" at 1440,1920 h20 r225
  text "PWM9" at 1540,1920 h20 r225
  text "PWM8" at 1640,1920 h20 r225
  text "PWM7" at 1800,1917.93 h20 r225
  text "PWM6" at 1900,1917.93 h20 r225
  text "PWM5" at 2000,1917.93 h20 r225
  text "PWM4" at 2100,1917.93 h20 r225
  text "PWM3" at 2200,1917.93 h20 r225
  text "22" at 3575,1900 h20 r315
  text "23" at 3875,1875 h20 r45
  text "24" at 3575,1800 h20 r315
  text "25" at 3875,1775 h20 r45
  text "26" at 3575,1700 h20 r315
  text "27" at 3875,1675 h20 r45
  text "28" at 3575,1600 h20 r315
  text "29" at 3875,1575 h20 r45
  text "30" at 3575,1500 h20 r315
  text "31" at 3875,1475 h20 r45
  text "32" at 3575,1400 h20 r315
  text "33" at 3875,1375 h20 r45
  text "34" at 3575,1300 h20 r315
  text "35" at 3875,1275 h20 r45
  text "36" at 3575,1200 h20 r315
  text "37" at 3875,1175 h20 r45
  text "38" at 3575,1100 h20 r315
  text "39" at 3875,1075 h20 r45
  text "40" at 3575,1000 h20 r315
  text "41" at 3875,975 h20 r45
  text "42" at 3575,900 h20 r315
  text "43" at 3875,875 h20 r45
  text "44" at 3575,800 h20 r315
  text "45" at 3875,775 h20 r45
  text "46" at 3575,700 h20 r315
  text "47" at 3875,675 h20 r45
  text "48" at 3575,600 h20 r315
  text "49" at 3875,575 h20 r45
  text "50" at 3575,500 h20 r315
  text "51" at 3875,475 h20 r45
  text "52" at 3575,400 h20 r315
  text "53" at 3875,375 h20 r45
  text "GND" at 3575,300 h20 r315
  text "GND" at 3875,275 h20 r45
  text "RESET" at 1300,175 h20 r45
  text "3v3" at 1400,175 h20 r45
  text "5v" at 1500,175 h20 r45
  text "GND" at 1600,175 h20 r45
  text "GND" at 1700,175 h20 r45
  text "Vin" at 1800,175 h20 r45
  text "AD0" at 2000,175 h20 r45
  text "AD1" at 2100,175 h20 r45
  text "AD2" at 2200,175 h20 r45
  text "AD3" at 2300,175 h20 r45
  text "AD4" at 2400,175 h20 r45
  text "AD5" at 2500,175 h20 r45
  text "AD6" at 2600,175 h20 r45
  text "AD7" at 2700,175 h20 r45
  text "AD8" at 2900,175 h20 r45
  text "AD9" at 3000,175 h20 r45
  text "AD10" at 3100,175 h20 r45
  text "AD11" at 3200,175 h20 r45
  text "AD12" at 3300,175 h20 r45
  text "AD13" at 3400,175 h20 r45
  text "AD14" at 3500,175 h20 r45
  text "AD15" at 3600,175 h20 r45
Mechanical 1:
  lines w5: -1197.5,1150 902.5,1150 ; 0,0 125,-125 3900,-125 3900,50 4000,150 4000,1500 3900,1600 3900,2000 3800,2100 0,2100